# Altium PCB PCB1.PcbDoc
Units mm, origin at the board's own origin, x right, y up, seen from the top; angles counter-clockwise.
Board outline 54 x 10 mm, 2 copper layers (Top Layer, Bottom Layer); 1 components, 4 nets, 24 pads, 0 vias.
Unrouted connection lines stored in the file: 20.
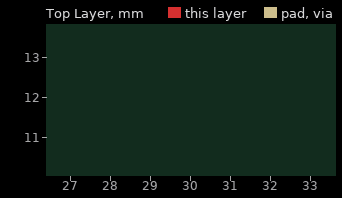
[diagram p0: Top Layer view]
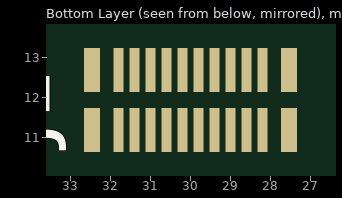
[diagram p1: Bottom Layer view, seen from below]

## Layer stack, top to bottom
Top Solder: solder mask 0.0102, Solder Resist, Dk 3.5
Top Layer: signal copper 0.0356
Dielectric 1: dielectric 0.32, FR-4, Dk 4.8
Bottom Layer: signal copper 0.0356
Bottom Solder: solder mask 0.0102, Solder Resist, Dk 3.5

## Board outline
3,5 3,15 57,15 57,5

## Design rules (kind name [scope] priority, off if disabled: settings)
Clearance [All] p1: gap=0.102 ignorepadtopadclearanceinfootprint=FALSE
PolygonConnect [All] p1: connectstyle=Relief reliefconductorwidth=0.254 reliefentries=4 polygonreliefangle="90 Angle" airgapwidth=0.254
RoutingVias [All] p1: holewidth=0.711 width=1.27 viastyle="Through Hole" minholewidth=0.711 minwidth=1.27 maxholewidth=0.711 maxwidth=1.27
SolderMaskExpansion [All] p1: expansion=0.102 istentingtop=FALSE
Width [All] p1: maxlimit=0.254 minlimit=0.254 preferedwidth=0.254
30 further rules are at their usual default settings.

## Components (designator, comment, footprint, x,y, rotation, side; value= is the part's Value field where it differs from the comment)
J1 "2039550203" 2039550203 30,12 r0 bottom

## Footprints (in the part's own frame and the unit in brackets; to place one, negate y for a bottom-side part, rotate by r counter-clockwise, add the part's x,y. Pads: shape width x height; smd on the part's side, far side on the other; paste and mask are expansions set on the pad)
2039550203 [mm]
  rect 0.25x1.1 smd mask+0.102: 1(-1.8,0.8) 2(-1.8,-0.7) 3(-1.4,0.8) 4(-1.4,-0.7) 5(-1,0.8) 6(-1,-0.7) 7(-0.6,0.8) 8(-0.6,-0.7) 9(-0.2,0.8) 10(-0.2,-0.7) 11(0.2,0.8) 12(0.2,-0.7) 13(0.6,0.8) 14(0.6,-0.7) 15(1,0.8) 16(1,-0.7) 17(1.4,0.8) 18(1.4,-0.7) 19(1.8,0.8) 20(1.8,-0.7)
  rect 0.4x1.1 smd mask+0.102: 21(-2.465,0.8) 22(-2.465,-0.7) 23(2.465,0.8) 24(2.465,-0.7)
  body extent -2.68,-1 2.68,1, height 2.9

## Nets (pads, with @x,y where several pads share a name; then routed paths per layer and width w, separated by ;. In a path a pad name is that pad's centre, name@x,y a point inside that pad or via, vN(x,y) a via of type N, cw(c..) or ccw(c..) an arc to the next point about the centre after c; other vN are vias at no path point)
AIN0: J1.9 J1.10
AIN1: J1.11 J1.12
EH_VOUT: J1.1 J1.2 J1.3 J1.4 J1.5 J1.6 J1.7 J1.8
GND: J1.13 J1.14 J1.15 J1.16 J1.17 J1.18 J1.19 J1.20 J1.21 J1.22 J1.23 J1.24

## Silkscreen, mask and mechanical layers (free items; w line width, h text height)
Mechanical 1:
  the board outline again, w0.102